# Altium PCB PCB1.PcbDoc
Units mm, origin at the board's own origin, x right, y up, seen from the top; angles counter-clockwise.
Board outline 130.56 x 65.79 mm, 2 copper layers (Top Layer, Bottom Layer); 22 components, 18 nets, 70 pads, 4 vias.
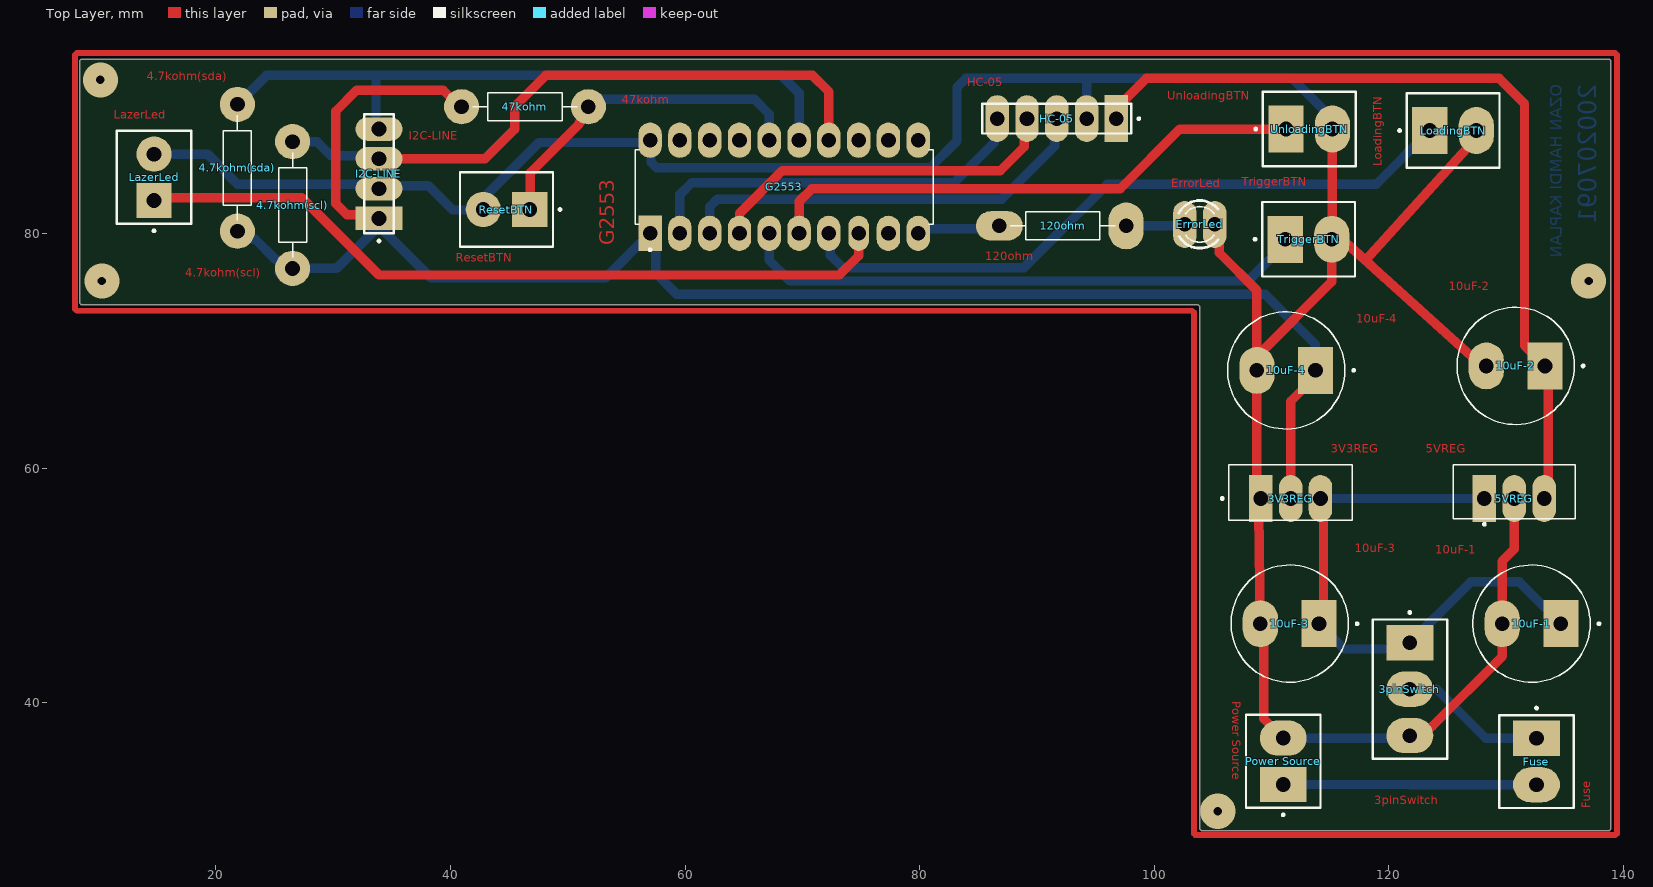
[diagram p0: Top Layer view]
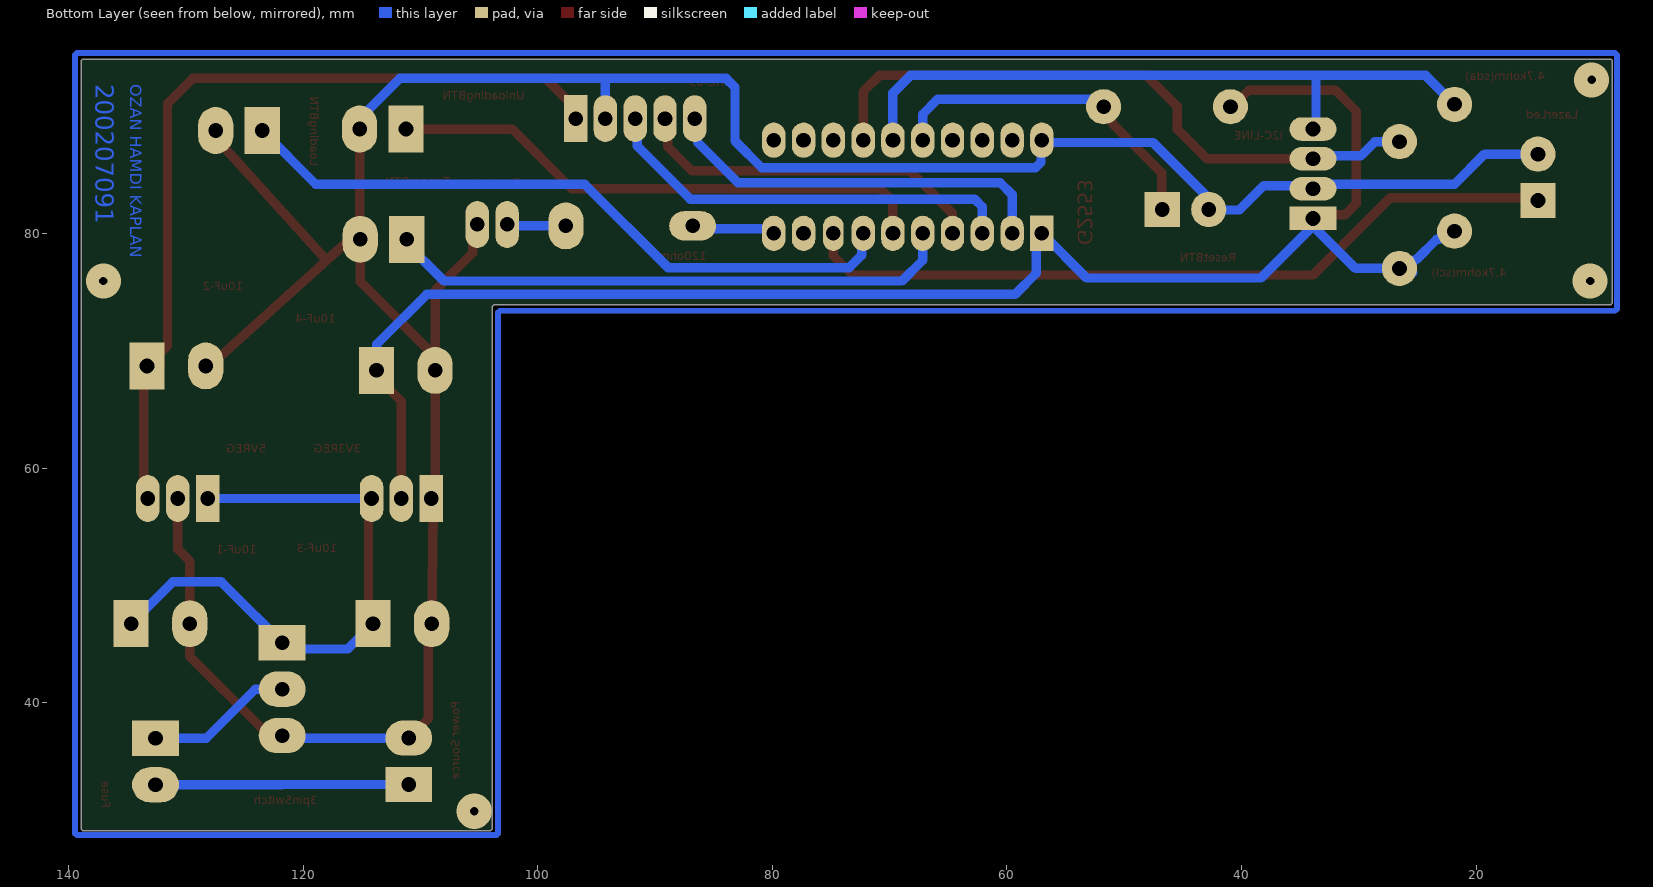
[diagram p1: Bottom Layer view, seen from below]
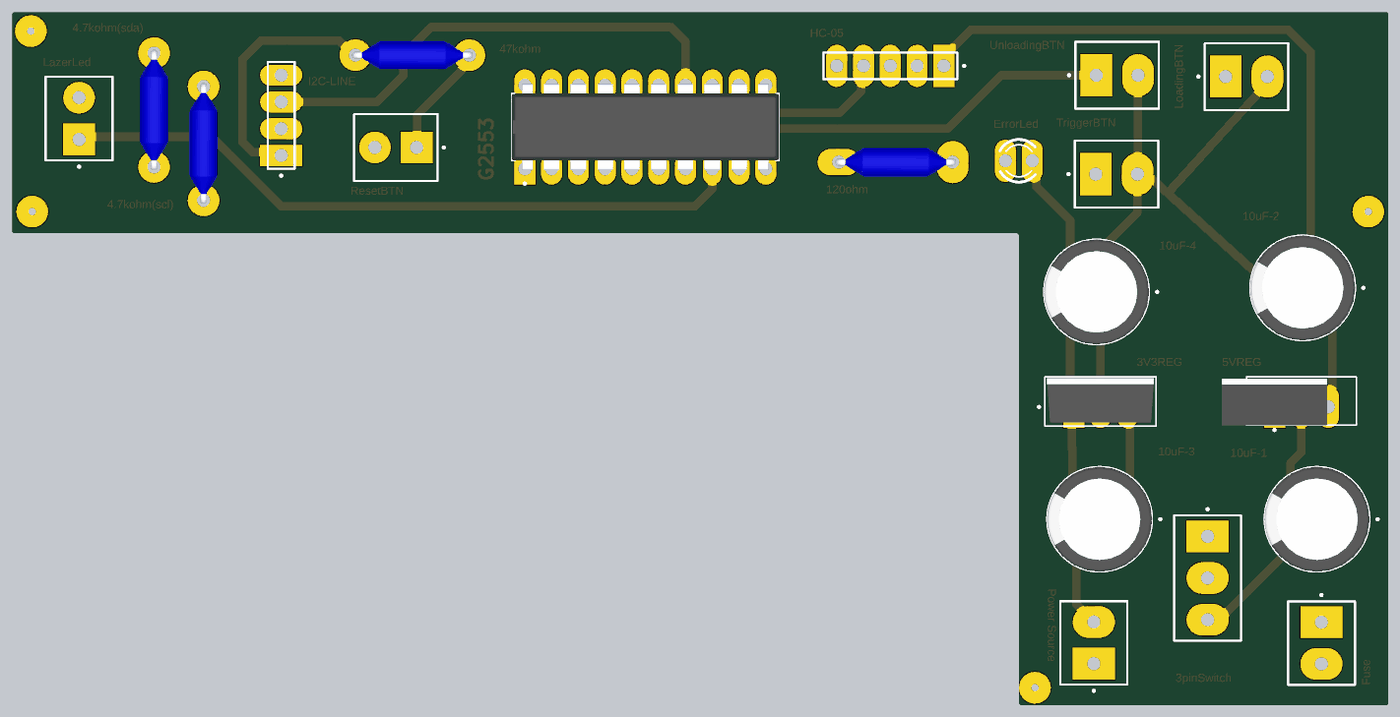
[diagram p2: 3D render of the assembled board from above, using the file's embedded part models]

## Layer stack, top to bottom
Top Solder: solder mask 0.0102, Solder Resist, Dk 3.5
Top Layer: signal copper 0.0356
Dielectric 1: dielectric 0.32, FR-4, Dk 4.8
Bottom Layer: signal copper 0.0356
Bottom Solder: solder mask 0.0102, Solder Resist, Dk 3.5

## Board outline
8.531,73.914 8.382,74.063 8.382,94.72 8.531,94.869 138.789,94.869 138.938,94.72 138.938,29.232 138.789,29.083 104.035,29.083 103.886,29.232 103.886,73.765 103.737,73.914

## Design rules (kind name [scope] priority, off if disabled: settings)
Clearance [All] p1: gap=0.254 ignorepadtopadclearanceinfootprint=FALSE except(0: Arc-Hole Track-Hole SMDPad-Hole THPad-Hole Via-Hole Fill-Hole Poly-Hole Region-Hole Text-Hole)
PolygonConnect [All] p1: thpad.connectstyle=Relief thpad.reliefconductorwidth=0.5 thpad.reliefentries=4 thpad.polygonreliefangle="45 Angle" thpad.airgapwidth=0.5 smdpad.connectstyle=Relief smdpad.reliefconductorwidth=0.254 smdpad.reliefentries=4 smdpad.polygonreliefangle="90 Angle" smdpad.airgapwidth=0.254 via.connectstyle=Direct via.reliefconductorwidth=0.254 via.reliefentries=4 via.polygonreliefangle="90 Angle" via.airgapwidth=0.254
RoutingVias [All] p1: holewidth=0.711 width=1.27 viastyle="Through Hole" minholewidth=0.711 minwidth=1.27 maxholewidth=0.711 maxwidth=1.27
SolderMaskExpansion [All] p1: expansion=0.102 istentingtop=FALSE
Width [All] p1: maxlimit=1 minlimit=0.6 preferedwidth=0.8 minimp=50.000000 maximp=50.000000 favimp=50.000000
30 further rules are at their usual default settings.

## Components (designator, comment, footprint, x,y, rotation, side; value= is the part's Value field where it differs from the comment)
3pinSwitch "FWJ-03-01-T-S" SAMTEC_FWJ-03-01-T-S 121.793,41.148 r270 top
3V3REG "LM1117T-3.3" TO254P1054X470X1955-3 111.633,57.404 r0 top
4.7kohm(scl) "RNC55H2941FSB14" RESAD1081W64L635D269#1 26.543,82.423 r270 top
4.7kohm(sda) "RNC55H2941FSB14" RESAD1081W64L635D269#1 21.844,85.598 r90 top (schematic designator 4.7kohm(sda)
5VREG "L7805CV" TO255P1040X460X1968-3 128.143,57.404 r0 top
10uF-1 "EEUFC1V221E" CAPPRD500W60D1000H1250 132.167,46.736 r180 top
10uF-2 "EEUFC1V221E" CAPPRD500W60D1000H1250 130.81,68.707 r180 top
10uF-3 "EEUFC1V221E" CAPPRD500W60D1000H1250 111.546,46.736 r180 top
10uF-4 "EEUFC1V221E" CAPPRD500W60D1000H1250 111.252,68.326 r180 top
47kohm "RNC55H2941FSB14" RESAD1081W64L635D269#1 46.355,90.805 r0 top
120ohm "RNC55H2941FSB14" RESAD1081W64L635D269#2 92.202,80.645 r0 top
ErrorLed "TLLR4400" LED3MM 103.886,80.772 r0 top
Fuse "FWJ-02-01-T-S" SAMTEC_FWJ-02-01-T-S#1 132.588,34.977 r270 top
G2553 "MSP430G2553IN20" DIP794W45P254L2540H508Q20 68.453,83.98 r90 top
HC-05 "TSW-105-23-L-S" SAMTEC_TSW-105-23-L-S 96.774,89.789 r180 top
I2C-LINE "TSW-104-24-G-S" SAMTEC_TSW-104-24-G-S 33.909,81.28 r90 top
LazerLed "FWJ-02-01-T-S" SAMTEC_FWJ-02-01-T-S#2 14.732,84.784 r90 top
LoadingBTN "FWJ-02-01-T-S" SAMTEC_FWJ-02-01-T-S#1 125.476,88.773 r0 top
"Power Source" "FWJ-02-01-T-S" SAMTEC_FWJ-02-01-T-S#1 110.998,35 r90 top
ResetBTN "FWJ-02-01-T-S" SAMTEC_FWJ-02-01-T-S#2 44.779,82.042 r180 top
TriggerBTN "FWJ-02-01-T-S" SAMTEC_FWJ-02-01-T-S#1 113.157,79.502 r0 top
UnloadingBTN "FWJ-02-01-T-S" SAMTEC_FWJ-02-01-T-S#1 113.209,88.9 r0 top

## Footprints (in the part's own frame and the unit in brackets; to place one, negate y for a bottom-side part, rotate by r counter-clockwise, add the part's x,y. Pads: shape width x height; smd on the part's side, far side on the other; paste and mask are expansions set on the pad)
CAPPRD500W60D1000H1250 [mm]
  oval 3x4 hole 1.25: N(2.5,0)
  rect 3x4 hole 1.25: P(-2.5,0)
  silkscreen extent -5.85,-5 5,5, body extent -5,-5 5,5, height 12.5
DIP794W45P254L2540H508Q20 [mm]
  rect 3x2 hole 1.25: 1(-3.97,11.43)
  oval 3x2 hole 1.25: 2(-3.97,8.89) 3(-3.97,6.35) 4(-3.97,3.81) 5(-3.97,1.27) 6(-3.97,-1.27) 7(-3.97,-3.81) 9(-3.97,-8.89) 10(-3.97,-11.43) 11(3.97,-11.43) 12(3.97,-8.89) 13(3.97,-6.35) 14(3.97,-3.81) 15(3.97,-1.27) 16(3.97,1.27) 17(3.97,3.81) 18(3.97,6.35) 19(3.97,8.89) 20(3.97,11.43)
  oval 3x1.75 hole 1.25: 8(-3.97,-6.35)
  silkscreen extent -5.47,-12.7 3.18,12.7, body extent -4.1,-12.7 4.1,12.7, height 5.08
LED3MM [mm]
  oval 2x4 hole 1.25: A(-1.27,0) K(1.27,0)
  silkscreen extent -1.79,-2.03 1.56,2.03
RESAD1081W64L635D269#1 [mm]
  round 3 hole 1.25: 1(-5.405,0) 2(5.405,0)
  silkscreen extent -4.47,-1.2 4.47,1.2, body extent -5.72,-1.35 5.72,1.35, height 2.69
RESAD1081W64L635D269#2 [mm]
  oval 4x2.5 hole 1.25: 1(-5.405,0)
  oval 3x4 hole 1.25: 2(5.405,0)
  silkscreen extent -4.47,-1.2 4.47,1.2, body extent -5.72,-1.35 5.72,1.35, height 2.69
SAMTEC_FWJ-02-01-T-S#1 [mm]
  rect 3x4 hole 1.25: 01(-1.98,0)
  oval 3x4 hole 1.25: 02(1.98,0)
  silkscreen extent -4.66,-3.18 3.96,3.18
SAMTEC_FWJ-02-01-T-S#2 [mm]
  rect 3x3 hole 1.25: 01(-1.98,0)
  round 3 hole 1.25: 02(1.98,0)
  silkscreen extent -4.66,-3.18 3.96,3.18
SAMTEC_FWJ-03-01-T-S [mm]
  rect 3x4 hole 1.25: 01(-3.96,0)
  oval 3x4 hole 1.25: 02(0,0) 03(3.96,0)
  silkscreen extent -6.64,-3.18 5.94,3.18
SAMTEC_TSW-104-24-G-S [mm]
  rect 2x4 hole 1.25: 01(0,0)
  oval 2x4 hole 1.25: 02(2.54,0) 03(5.08,0) 04(7.62,0)
  silkscreen extent -2.02,-1.27 8.89,1.27
SAMTEC_TSW-105-23-L-S [mm]
  rect 2x4 hole 1.25: 01(0,0)
  oval 2x4 hole 1.25: 02(2.54,0) 03(5.08,0) 04(7.62,0) 05(10.16,0)
  silkscreen extent -2.02,-1.27 11.43,1.27
TO254P1054X470X1955-3 [mm]
  rect 2x4 hole 1.25: 1(-2.54,0)
  oval 2x4 hole 1.25: 2(0,0) 3(2.54,0)
  silkscreen extent -5.94,-1.84 5.27,2.86, body extent -5.08,-1.49 5.08,2.71, height 22.86
TO255P1040X460X1968-3 [mm]
  rect 2x4 hole 1.25: 1(0,0)
  oval 2x4 hole 1.25: 2(2.55,0) 3(5.1,0)
  silkscreen extent -2.65,-2.29 7.75,2.86, body extent -4.98,-1.76 4.98,2.69, height 19.68

## Part data
3pinSwitch: "Connector Header Through Hole 3 position 0.156 (3.96mm)", Package=None, Availability=Bad, MF=Samtec, MP=FWJ-03-01-T-S, Price=None, SnapEDA_Link=https://www.snapeda.com/parts/FWJ-03-01-T-S/Samtec/view-part/3298631/?ref=snap, Toby_UK-Purchase-URL=https://snapeda.com/shop?store=Toby+UK&id=3298631
3V3REG: library part LM1117T-3.3/NOPB, "800-mA 15-V linear voltage regulator", Package="TO-220-3 Texas Instruments", Availability="In Stock", Check_prices=https://www.snapeda.com/parts/LM1117T-3.3/NOPB/Texas+Instruments/view-part/?ref=eda, MF="Texas Instruments", MP=LM1117T-3.3/NOPB, Price=None, Purchase-URL=https://pricing.snapeda.com/search/part/LM1117T-3.3/NOPB/?ref=eda, SnapEDA_Link=https://www.snapeda.com/parts/LM1117T-3.3/NOPB/Texas+Instruments/view-part/?ref=snap
4.7kohm(scl) 4.7kohm(sda) 47kohm 120ohm: "Resistor,Metal Film,ERC-55 2.94K 1% T-2 RNC55H2941FS B14", Package="erc55 Vishay", Check_prices=https://www.snapeda.com/parts/RNC55H2941FSB14/Vishay/view-part/?ref=eda, MF=Vishay, MP=RNC55H2941FSB14, SnapEDA_Link=https://www.snapeda.com/parts/RNC55H2941FSB14/Vishay/view-part/?ref=snap
5VREG: "Linear Voltage Regulator IC Positive Fixed 1 Output 1.5A TO-220", Package="TO-220-3 ON Semiconductor", Availability="In Stock", Check_prices=https://www.snapeda.com/parts/L7805CV/STMicroelectronics/view-part/?ref=eda, MF=STMicroelectronics, MP=L7805CV, Price=None, Purchase-URL=https://pricing.snapeda.com/search/part/L7805CV/?ref=eda, SnapEDA_Link=https://www.snapeda.com/parts/L7805CV/STMicroelectronics/view-part/?ref=snap
10uF-1 10uF-2 10uF-3 10uF-4: "Aluminum Electrolytic Capacitors - Radial Leaded", Package="RADIAL-2 Panasonic", Availability="In Stock", Check_prices=https://www.snapeda.com/parts/EEU-FC1V221E/Panasonic/view-part/6222388/?ref=eda, MF=Panasonic, MP=EEU-FC1V221E, Price=None, Purchase-URL=https://pricing.snapeda.com/search/part/EEU-FC1V221E/?ref=eda, SnapEDA_Link=https://www.snapeda.com/parts/EEU-FC1V221E/Panasonic/view-part/6222388/?ref=snap
ErrorLed: "Red 619nm LED Indication - Discrete 1.9V Radial", Package="Radial Vishay Semiconductor", Availability=Unavailable, MF=Vishay, MP=TLLR4400, Price=None, SnapEDA_Link=https://www.snapeda.com/parts/TLLR4400/Vishay%20Semiconductor%20Opto%20Division/view-part/557946/?ref=snap
Fuse LazerLed LoadingBTN "Power Source" ResetBTN TriggerBTN UnloadingBTN: "Connector Header Through Hole 2 position 0.156 (3.96mm)", Package=None, Availability="In Stock", Check_prices=https://www.snapeda.com/parts/FWJ-02-01-T-S/Samtec/view-part/3368235/?ref=eda, MF=Samtec, MP=FWJ-02-01-T-S, Price=None, Purchase-URL=https://pricing.snapeda.com/search/part/FWJ-02-01-T-S/?ref=eda, SnapEDA_Link=https://www.snapeda.com/parts/FWJ-02-01-T-S/Samtec/view-part/3368235/?ref=snap
G2553: "16 MHz MCU with 16KB Flash, 512B SRAM, comparator, UART/SPI/I2C, timer", Package="PDIP-20 Texas Instruments", Check_prices=https://www.snapeda.com/parts/MSP430G2553IN20/Texas+Instruments/view-part/?ref=eda, MF="Texas Instruments", MP=MSP430G2553IN20, SnapEDA_Link=https://www.snapeda.com/parts/MSP430G2553IN20/Texas+Instruments/view-part/?ref=snap
HC-05: "Connector Header Through Hole 5 position 0.100 (2.54mm)", Package=None, Check_prices=https://www.snapeda.com/parts/TSW-105-23-L-S/Samtec/view-part/?ref=eda, Digi-Key_Part_Number=SAM1071-05-ND, MF=Samtec, MP=TSW-105-23-L-S, Purchase-URL=https://pricing.snapeda.com/search/part/TSW-105-23-L-S/?ref=eda, SnapEDA_Link=https://www.snapeda.com/parts/TSW-105-23-L-S/Samtec/view-part/?ref=snap
I2C-LINE: "Connector Header Through Hole 4 position 0.100 (2.54mm)", Package=None, Availability=Unavailable, MF=Samtec, MP=TSW-104-24-G-S, Price=None, SnapEDA_Link=https://www.snapeda.com/parts/TSW-104-24-G-S/Samtec/view-part/3451889/?ref=snap

## Via types
v1: diameter 3, hole 0.711, Top Layer to Bottom Layer, 4 vias

## Nets (pads, with @x,y where several pads share a name; then routed paths per layer and width w, separated by ;. In a path a pad name is that pad's centre, name@x,y a point inside that pad or via, vN(x,y) a via of type N, cw(c..) or ccw(c..) an arc to the next point about the centre after c; other vN are vias at no path point)
3.3V: 3V3REG.2 4.7kohm(scl).2 4.7kohm(sda).1 10uF-4.P 47kohm.1 G2553.1 I2C-LINE.01 | length 143.1
  Top Layer w0.8: I2C-LINE.01 33.591,81.598 31.178,81.598 30.226,82.55 30.226,90.424 32.004,92.202 39.381,92.202 40.778,90.805 47kohm.1 ; 3V3REG.2 111.633,65.699 10uF-4.P@114.26,68.326
  Bottom Layer w0.8: 21.844,80.193 22.439,80.193 23.132,79.5 23.37,79.5 25.088,77.782 25.184,77.782 25.852,77.114 25.852,77.018 30.282,77.018 33.528,80.264 I2C-LINE.01@33.528,80.645 ; 25.4,76.637 25.852,76.637 ; I2C-LINE.01 33.909,80.899 33.909,80.645 38.354,76.2 53.213,76.2 G2553.1 57.498,79.535 57.498,76.614 59.309,74.803 109.474,74.803 113.72,70.557 113.72,68.358 10uF-4.P
5V: 5VREG.3 10uF-2.P HC-05.01 | length 72.9
  Top Layer w0.8: HC-05.01 97.374,90.389 97.374,91.278 99.314,93.218 129.413,93.218 131.572,91.059 131.572,70.445 10uF-2.P ; 10uF-2.P@132.167,68.834 133.604,67.397 133.604,58.973 133.473,58.841 133.473,57.634 5VREG.3
12V: "Power Source.01" Fuse.02 | length 21.6
  Bottom Layer w0.8: 110.998,33.02 121.793,33.02 121.816,32.997 Fuse.02
12Vcc: 3pinSwitch.01 3V3REG.3 5VREG.1 10uF-1.P 10uF-3.P | length 49.9
  Top Layer w0.8: 10uF-3.P 114.427,47.117 3V3REG.3@114.427,57.404
  Bottom Layer w0.8: 10uF-3.P 116.205,44.577 121.262,44.577 126.977,50.292 131.111,50.292 10uF-1.P ; 3V3REG.3@114.427,57.404 5VREG.1
12Vfuse: 3pinSwitch.02 Fuse.01 | length 12.5
  Bottom Layer w0.8: 3pinSwitch.02 124.079,41.148 128.27,36.957 Fuse.01
ErrorLed: 120ohm.1 G2553.10 | length 7.4
  Bottom Layer w0.8: G2553.10 80.264,80.391 120ohm.1@87.082,80.391
GND: 3pinSwitch.03 3V3REG.1 5VREG.2 10uF-1.N 10uF-2.N 10uF-3.N 10uF-4.N "Power Source.02" ErrorLed.K G2553.20 HC-05.02 I2C-LINE.02 LazerLed.02 LoadingBTN.02 ResetBTN.02 TriggerBTN.02 UnloadingBTN.02 | length 255.5
  Top Layer w0.8: ErrorLed.K@105.537,81.913 105.386,81.761 105.386,79.355 105.537,79.203 105.537,78.359 108.752,75.144 10uF-4.N@108.752,69.509 ; 3V3REG.1@108.968,57.783 3V3REG.1@108.968,57.529 ; 3V3REG.1 3V3REG.1@108.968,57.529 ; 110.998,36.98 109.347,38.631 109.347,46.435 10uF-3.N 108.896,56.299 108.896,56.953 108.968,57.025 3V3REG.1@108.968,57.529 ; TriggerBTN.02 115.137,75.894 10uF-4.N@108.752,69.509 ; UnloadingBTN.02 115.189,80.323 115.764,79.748 116.005,79.507 117.847,77.841 119.283,76.543 119.584,76.271 127.948,68.707 10uF-2.N ; 118.008,77.696 127.035,87.679 127.035,88.352 LoadingBTN.02 ; 3pinSwitch.03 122.888,37.188 123.688,37.987 123.712,37.987 129.667,43.942 10uF-1.N 129.667,52.07 130.693,53.096 5VREG.2 ; 10uF-4.N@108.752,69.509 108.752,68.747 10uF-4.N 108.752,57.745 3V3REG.1@108.968,57.529
  Bottom Layer w0.8: LazerLed.02 19.281,86.764 21.844,84.201 32.34,84.201 32.492,84.05 33.679,84.05 I2C-LINE.02 34.139,84.05 35.453,84.05 35.478,84.074 38.125,84.074 40.198,82.001 41.835,82.001 42.43,82.597 42.43,82.637 42.851,83.058 47.55,87.757 56.83,87.757 G2553.20 57.099,87.874 57.099,86.067 57.568,85.598 80.899,85.598 83.185,87.884 83.185,92.456 83.947,93.218 93.941,93.218 ; HC-05.02 94.234,92.845 ; 94.234,92.925 93.941,93.218 ; 110.998,36.98 121.585,36.98 3pinSwitch.03 ; UnloadingBTN.02 115.189,89.495 114.524,90.16 114.524,90.454 111.76,93.218 94.234,93.218 93.941,93.218
LazerLed: G2553.8 LazerLed.01 | length 65.5
  Top Layer w0.8: LazerLed.01 14.986,83.058 27.305,83.058 33.909,76.454 73.152,76.454 74.803,78.105 G2553.8
LoaBtn: G2553.7 LoadingBTN.01 | length 58.3
  Bottom Layer w0.8: G2553.7 72.397,79.876 72.397,78.141 73.449,77.089 88.9,77.089 96.012,84.201 118.924,84.201 LoadingBTN.01
Net47kohm_2: 47kohm.2 G2553.16 ResetBTN.01 | length 27.8
  Top Layer w0.8: ResetBTN.01@46.811,83.058 46.811,85.165 50.996,89.35 50.996,89.446 51.76,90.21 47kohm.2
  Bottom Layer w0.8: 47kohm.2@51.887,91.44 65.913,91.44 67.183,90.17 G2553.16
Net120ohm_2: 120ohm.2 ErrorLed.A | length 5.5
  Bottom Layer w0.8: 120ohm.2 102.062,80.645 102.403,80.987 ErrorLed.A@102.403,81.527
RX: G2553.4 HC-05.04 | length 30.8
  Top Layer w0.8: G2553.4 64.643,81.712 68.275,85.344 86.868,85.344 88.924,87.4 88.924,89.559 HC-05.04
SCL: 4.7kohm(scl).1 G2553.14 I2C-LINE.03 | length 55.8
  Top Layer w0.8: I2C-LINE.03 42.951,86.36 45.491,88.9 45.491,90.83 48.133,93.472 70.866,93.472 72.263,92.075 G2553.14
  Bottom Layer w0.8: 26.006,88.138 26.445,87.699 ; 26.445,87.826 28.633,87.826 29.845,86.614 32.34,86.614 32.365,86.59 33.679,86.59 I2C-LINE.03
SDA: 4.7kohm(sda).2 G2553.15 I2C-LINE.04 | length 58.2
  Bottom Layer w0.8: 21.844,91.003 24.313,93.472 33.655,93.472 ; I2C-LINE.04 33.655,89.154 33.655,93.472 ; G2553.15 69.723,91.973 68.224,93.472 33.655,93.472
Status: G2553.2 HC-05.05 | length 34.1
  Bottom Layer w0.8: G2553.2 59.563,83.325 60.566,84.328 82.931,84.328 86.384,87.781 86.384,89.559 HC-05.05
TrigBtn: G2553.5 TriggerBTN.01 | length 48.9
  Bottom Layer w0.8: G2553.5 67.183,77.724 68.961,75.946 108.002,75.946 TriggerBTN.01@111.558,79.502
TX: G2553.3 HC-05.03 | length 36.2
  Bottom Layer w0.8: G2553.3 62.103,82.271 62.763,82.931 86.995,82.931 91.518,87.454 91.518,89.613 HC-05.03
UnlBtn: G2553.6 UnloadingBTN.01 | length 46.8
  Top Layer w0.8: G2553.6 69.723,82.728 70.815,83.82 97.104,83.82 102.184,88.9 UnloadingBTN.01
pads on no net: G2553.9 G2553.11 G2553.12 G2553.13 G2553.17 G2553.18 G2553.19
copper on no net: | length 791.4
  Top Layer w0.254: 8.001,73.555 8.15,73.406 ; 8.001,95.228 8.15,95.377 ; 103.229,73.406 103.378,73.257 ; 103.378,28.851 103.527,28.702 ; 139.297,28.702 139.446,28.851 ; 139.297,95.377 139.446,95.228
  Top Layer w0.5: 8.001,73.555 8.001,95.228 ; 8.15,73.406 103.229,73.406 ; 8.15,95.377 139.297,95.377 ; 103.378,28.851 103.378,73.257 ; 103.527,28.702 139.297,28.702 ; 139.446,28.851 139.446,95.228
  Bottom Layer w0.254: 8.001,73.555 8.15,73.406 ; 8.001,95.228 8.15,95.377 ; 103.229,73.406 103.378,73.257 ; 103.378,28.851 103.527,28.702 ; 139.297,28.702 139.446,28.851 ; 139.297,95.377 139.446,95.228
  Bottom Layer w0.5: 8.001,73.555 8.001,95.228 ; 8.15,73.406 103.229,73.406 ; 8.15,95.377 139.297,95.377 ; 103.378,28.851 103.378,73.257 ; 103.527,28.702 139.297,28.702 ; 139.446,28.851 139.446,95.228
  other v1: 105.41,30.734 10.287,75.946 137.033,75.946 10.16,93.091

## Other copper
Bottom Layer:
  text "OZAN HAMDI KAPLAN" at 134.747,92.71 h1 r90
  text "200207091" at 137.668,92.71 h1.52 r90